# EAGLE board MicroMouse_Schematics_Final2 (EAGLE 8.7.0)
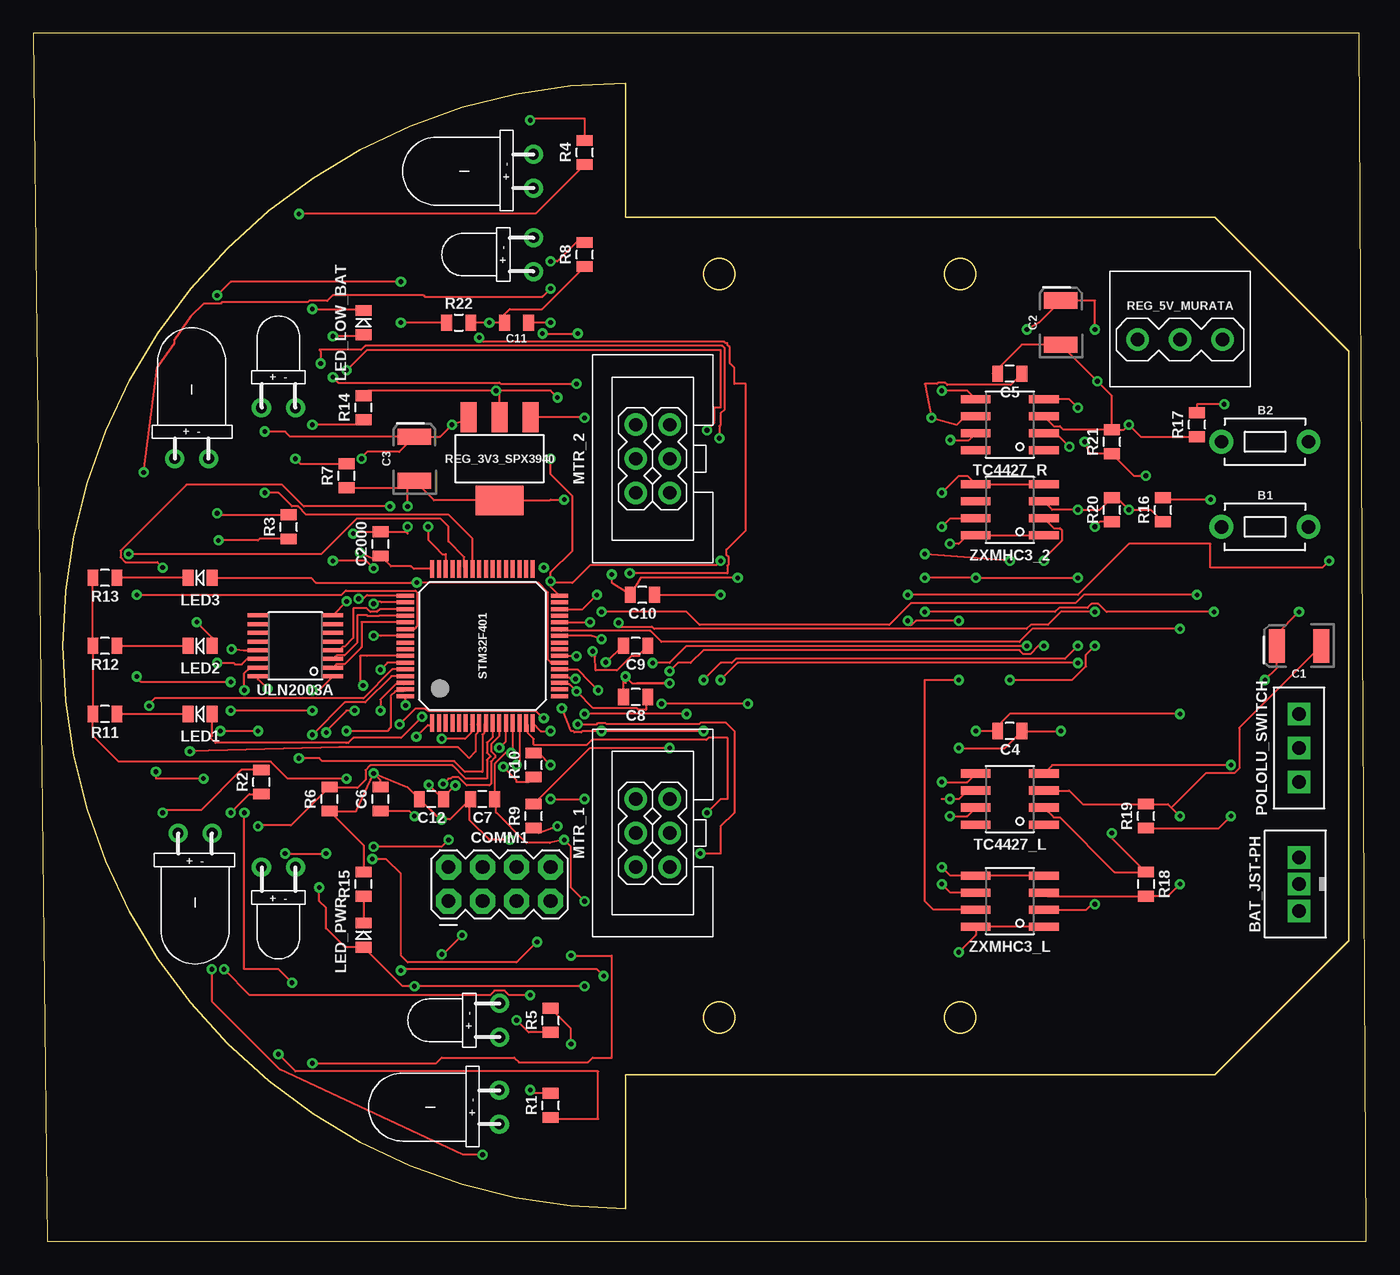
[diagram p0: board, top side]
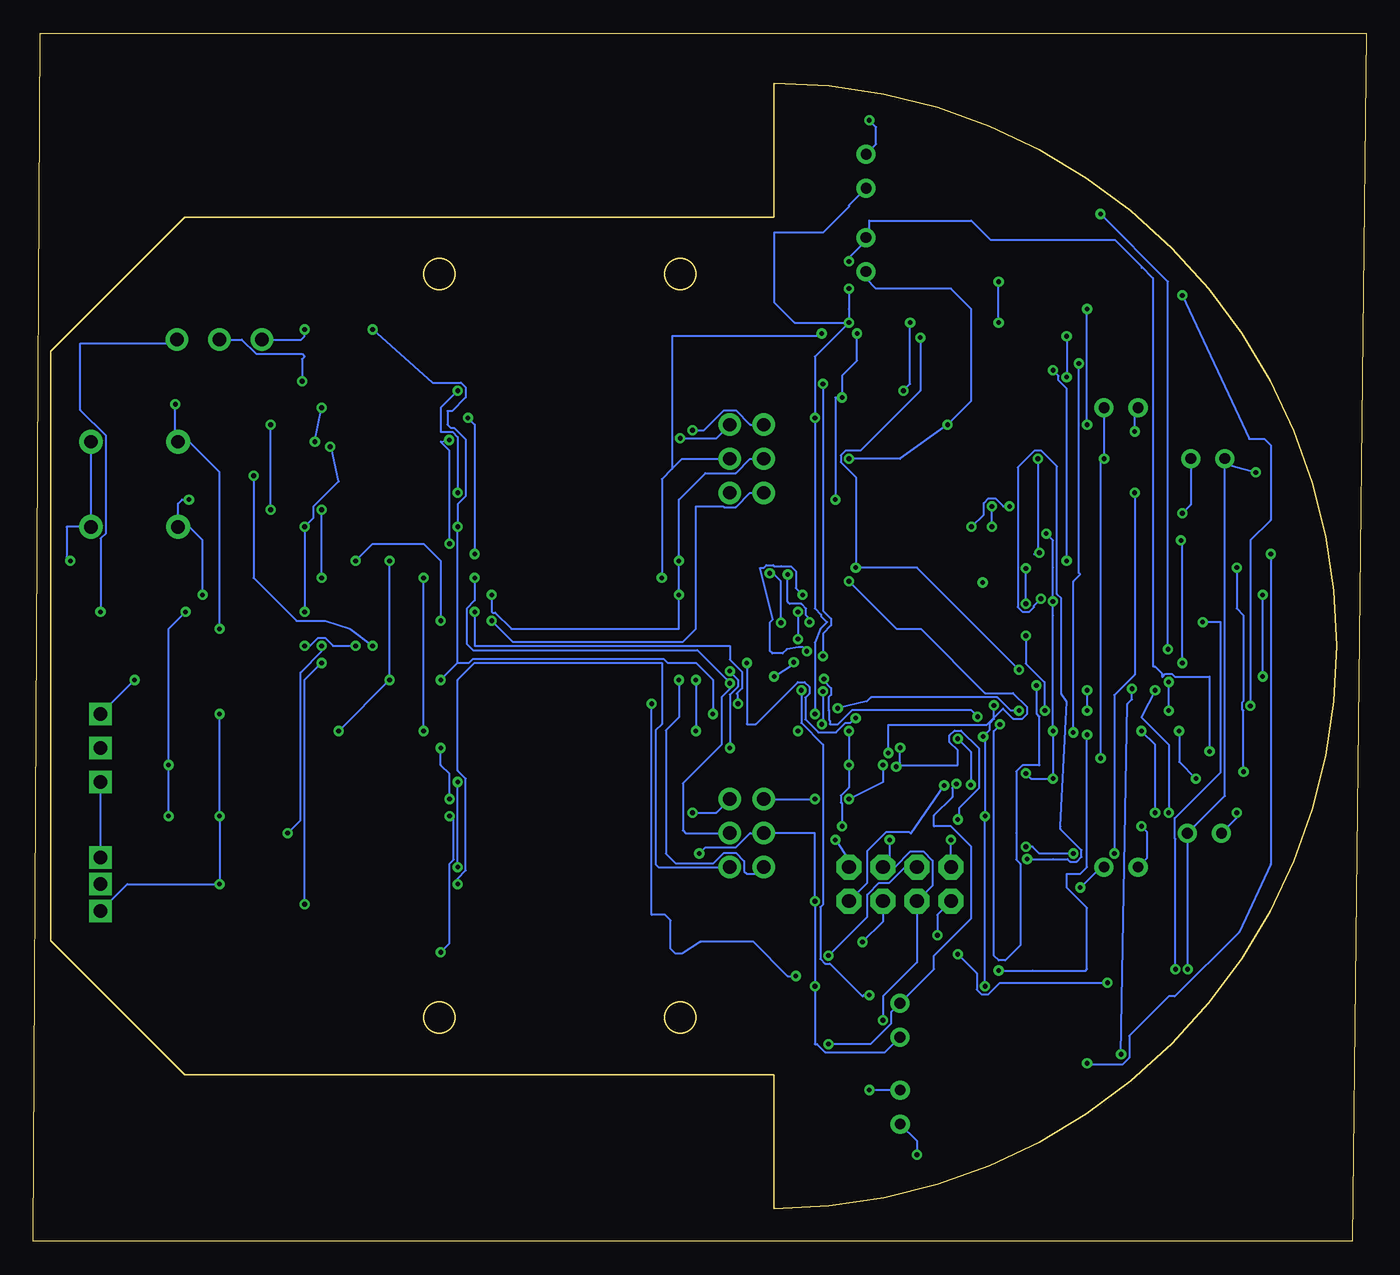
[diagram p1: board, bottom side, seen from below]

Size 99.49 x 90.16 mm. Coordinates in mm from the lower left corner, seen from the top.
Outline: 1.02,0 99.49,0 98.98,90.16 0,90.16 1.02,0
Copper layers (1*16): Top 0.035mm / dielectric 1.5mm / Bottom 0.035mm
Design rules "default": minimum track width 6mil, minimum drill 0.35mm, track to track 6mil, track to pad 6mil, pad to pad 6mil, via to via 6mil, smd to smd 6mil, copper to edge 40mil, drill to drill 6mil, minimum pad ring 10mil, minimum via ring 8mil, stop-mask expansion 4mil, vias tented up to drill 0mil, thermal gap 10mil

## Footprints (pad centres in the part's own frame; a part is rotated, then mirrored left to right if it is on the bottom)
POLOLU_BUTTON = drill 1 pad 1.778: P$1 -3.25,0; P$2 3.25,0
B3B-PH-K-S = drill 1 pad 1.676 square: BAT_+ 2,0; BAT_- -2,0; NC 0,0
EIA3528 = smd 1.2 x 2.5: A 1.65,0; C -1.65,0
0805 = smd 0.8 x 1.2: 1 -0.9,0; 2 0.9,0
2X4 = drill 1.016 pad 1.88 octagon: 1 -3.81,-1.27; 2 -3.81,1.27; 3 -1.27,-1.27; 4 -1.27,1.27; 5 1.27,-1.27; 6 1.27,1.27; 7 3.81,-1.27; 8 3.81,1.27
EMITTER = drill 0.8 pad 1.422: EM_+ -1.397,0.016; EM_- 1.143,0.016
LED-0805 = smd 0.8 x 1.2: A -0.9,0; C 0.9,0
MOTOR_ENCODER_HEADER = drill 1 pad 1.676: ENC_A 2.54,1.27; ENC_B 2.54,-1.27; ENC_GND 0,-1.27; ENC_VDD 0,1.27; MTR+ -2.54,1.27; MTR_- -2.54,-1.27
POLOLU_SWITCH = drill 1 pad 1.676 square: PIN1 -2.54,0; PIN2 0,0; PIN3 2.54,0
RECEIVER = drill 0.8 pad 1.422: RE_+ -1.27,0; RE_- 1.27,0
SOT223 = smd 1.219 x 2.235: GND 0,-3.099; IN -2.311,-3.099; OUT 2.311,-3.099 | smd 3.6 x 2.2: GND2 0,3.099
5V_REG_MURATA = drill 1 pad 1.676: GND 0,0; IN -3.175,0; OUT 3.175,0
LQFP64 = smd 0.3 x 1.3: BOOT0 -1.75,5.75; PA3 -3.75,-5.75; PA4 -2.25,-5.75; PA5 -1.75,-5.75; PA6 -1.25,-5.75; PA7 -0.75,-5.75; PA14 3.75,5.75; PA15 3.25,5.75; PB0 0.75,-5.75; PB1 1.25,-5.75; PB2 1.75,-5.75; PB3 0.75,5.75; PB4 0.25,5.75; PB5 -0.25,5.75; PB6 -0.75,5.75; PB7 -1.25,5.75; PB8 -2.25,5.75; PB9 -2.75,5.75; PB10 2.25,-5.75; PC4 -0.25,-5.75; PC5 0.25,-5.75; PC10 2.75,5.75; PC11 2.25,5.75; PC12 1.75,5.75; PD2 1.25,5.75; VCAP_1 2.75,-5.75; VDD_0 -2.75,-5.75; VDD_1 3.75,-5.75; VDD_3 -3.75,5.75; VSS_0 -3.25,-5.75; VSS_1 -3.25,5.75; VSS_2 3.25,-5.75 | smd 1.3 x 0.3: NRST -5.75,0.75; PA0_WKUP -5.75,-2.75; PA1 -5.75,-3.25; PA2 -5.75,-3.75; PA8 5.75,0.25; PA9 5.75,0.75; PA10 5.75,1.25; PA11 5.75,1.75; PA12 5.75,2.25; PA13 5.75,2.75; PB12 5.75,-3.75; PB13 5.75,-3.25; PB14 5.75,-2.75; PB15 5.75,-2.25; PC0 -5.75,0.25; PC1 -5.75,-0.25; PC2 -5.75,-0.75; PC3 -5.75,-1.25; PC6 5.75,-1.75; PC7 5.75,-1.25; PC8 5.75,-0.75; PC9 5.75,-0.25; PC13 -5.75,3.25; PC14 -5.75,2.75; PC15 -5.75,2.25; PH0 -5.75,1.75; PH1 -5.75,1.25; VBAT -5.75,3.75; VDD_2 5.75,3.75; VDDA -5.75,-2.25; VSS_3 5.75,3.25; VSSA -5.75,-1.75
TC4427_SOIC8 = smd 0.61 x 2.21: GND 0.635,-2.54; IN_A -0.635,-2.54; IN_B 1.905,-2.54; NC1 -1.905,-2.54; NC2 -1.905,2.54; OUT_A -0.635,2.54; OUT_B 1.905,2.54; VDD 0.635,2.54
ULN2003A = smd 1.55 x 0.3: 1B -2.8,2.275; 1C 2.8,2.275; 2B -2.8,1.625; 2C 2.8,1.625; 3B -2.8,0.975; 3C 2.8,0.975; 4B -2.8,0.325; 4C 2.8,0.325; 5B -2.8,-0.325; 5C 2.8,-0.325; 6B -2.8,-0.975; 6C 2.8,-0.975; 7B -2.8,-1.625; 7C 2.8,-1.625; COM 2.8,-2.275; GND -2.8,-2.275
ZXMHC3 = smd 0.61 x 2.21: N1D/P1D -0.635,-2.54; N1G -1.905,-2.54; N1S/N2S 0.635,-2.54; N2D/P2D 0.635,2.54; N2G 1.905,-2.54; P1G -1.905,2.54; P1S/P2S -0.635,2.54; P2G 1.905,2.54

## Placement (x,y rotation side)
B1  POLOLU_BUTTON  [POLOLU_BUTTON]  91.95,53.34 0 top
B2  POLOLU_BUTTON  [POLOLU_BUTTON]  91.95,59.69 0 top
BAT_JST-PH  3PIN  [B3B-PH-K-S]  94.49,26.67 90 top
C1  47uF  [EIA3528]  94.49,44.45 180 top
C2  47uF  [EIA3528]  76.71,68.58 90 top
C3  47uF  [EIA3528]  28.45,58.42 90 top
C4  1.0uF  [0805]  72.9,38.1 180 top
C5  1.0uF  [0805]  72.9,64.77 180 top
C6  0.1uF  [0805]  25.91,33.02 90 top
C7  0.1uF  [0805]  33.53,33.02 180 top
C8  0.1uF  [0805]  44.96,40.64 180 top
C9  2.2uF  [0805]  44.96,44.45 180 top
C10  0.1uF  [0805]  45.47,48.26 180 top
C11  10uF  [0805]  36.07,68.58 180 top
C12  0.1uF  [0805]  29.72,33.02 180 top
C2000  0.1uF  [0805]  25.91,52.07 90 top
COMM1  M04X2  [2X4]  34.8,26.67 0 top
E$1  [MOUSE_OUTLINE_2WHEEL]  60.2,44.45 90 top
EM_1  SFH4545  [EMITTER]  34.8,10.16 90 top
EM_2  SFH4545  [EMITTER]  11.94,30.48 180 top
EM_3  SFH4545  [EMITTER]  11.94,58.42 0 top
EM_4  SFH4545  [EMITTER]  37.34,80.01 90 top
LED1  LED  [LED-0805]  12.45,39.37 180 top
LED2  LED  [LED-0805]  12.45,44.45 180 top
LED3  LED  [LED-0805]  12.45,49.53 180 top
LED_LOW_BAT  LED  [LED-0805]  24.64,68.58 90 top
LED_PWR  LED  [LED-0805]  24.64,22.86 90 top
MTR_1  MOTOR_ENCODER_HEADER  [MOTOR_ENCODER_HEADER]  46.23,30.48 90 top
MTR_2  MOTOR_ENCODER_HEADER  [MOTOR_ENCODER_HEADER]  46.23,58.42 90 top
POLOLU_SWITCH  POLOLU_SWITCH  [POLOLU_SWITCH]  94.49,36.83 90 top
R1  16K  [0805]  38.61,10.16 90 top
R2  16K  [0805]  17.02,34.29 90 top
R3  16K  [0805]  19.05,53.34 90 top
R4  16K  [0805]  41.15,81.28 90 top
R5  1.8K  [0805]  38.61,16.51 90 top
R6  1.8K  [0805]  22.1,33.02 90 top
R7  1.8K  [0805]  23.37,57.15 90 top
R8  1.8K  [0805]  41.15,73.66 90 top
R9  30K  [0805]  37.34,31.75 90 top
R10  10K  [0805]  37.34,35.56 90 top
R11  1K  [0805]  5.33,39.37 180 top
R12  1K  [0805]  5.33,44.45 180 top
R13  1K  [0805]  5.33,49.53 180 top
R14  1K  [0805]  24.64,62.23 90 top
R15  1K  [0805]  24.64,26.67 90 top
R16  47K  [0805]  84.33,54.61 90 top
R17  47K  [0805]  86.87,60.96 90 top
R18  47K  [0805]  83.06,26.67 270 top
R19  47K  [0805]  83.06,31.75 90 top
R20  47K  [0805]  80.52,54.61 90 top
R21  47K  [0805]  80.52,59.69 90 top
R22  47K  [0805]  31.75,68.58 0 top
RE_LD  TEFT4300  [RECEIVER]  18.29,27.94 180 top
RE_LF  TEFT4300  [RECEIVER]  34.8,16.51 90 top
RE_RD  TEFT4300  [RECEIVER]  18.29,62.23 0 top
RE_RF  TEFT4300  [RECEIVER]  37.34,73.66 90 top
REG_3V3_SPX3940  3V3_REG  [SOT223]  34.8,58.42 180 top
REG_5V_MURATA  REG_5V_MURATA  [5V_REG_MURATA]  85.6,67.31 180 top
STM32F401  STM32F4_401_410_411_412_413_446  [LQFP64]  33.53,44.45 90 top
TC4427_L  TC4427_SOIC8  [TC4427_SOIC8]  72.9,33.02 90 top
TC4427_R  TC4427_SOIC8  [TC4427_SOIC8]  72.9,60.96 90 top
ULN2003A  ULN2003A  [ULN2003A]  19.56,44.45 180 top
ZXMHC3_2  ZXMHC3  [ZXMHC3]  72.9,54.61 90 top
ZXMHC3_L  ZXMHC3  [ZXMHC3]  72.9,25.4 90 top

## Library data of the parts
B1 B2 = POLOLU_BUTTON
BAT_JST-PH = BATT_JST-PH_3PIN
C1-C3 = SparkFun-Capacitors; PROD_ID: CAP-08310
C4-C10 C12 C2000 = CAP_CERAMIC_0805IN_2012MM
C11 = SparkFun-Capacitors; PROD_ID: CAP-11330
COMM1 = 2X4_PIN_HEADER
E$1 = MOUSE_OUTLINE_2WHEEL
EM_1-EM_4 = SFH4545
LED1-LED3 LED_LOW_BAT LED_PWR = LED_0805
MTR_1 MTR_2 = MOTOR_ENCODER_HEADER
POLOLU_SWITCH = POLOLU_SWITCH
R1-R22 = RESISTOR_0805IN_2012MM
RE_LD RE_LF RE_RD RE_RF = TEFT4300
REG_3V3_SPX3940 = REG_3V3_LM3940
REG_5V_MURATA = REG_5V_MURATA
STM32F401 = STM32F4_401_410_411_412_413_446
TC4427_L TC4427_R = TC4427
ULN2003A = ULN2003A
ZXMHC3_2 ZXMHC3_L = ZXMHC3

## Nets
+3V3: B1.P$2 B2.P$2 C3.A C6.1 C7.1 C8.1 C10.1 C2000.1 COMM1.8 LED_PWR.A MTR_1.ENC_VDD MTR_2.ENC_VDD RE_LD.RE_+ RE_LF.RE_+ RE_RD.RE_+ RE_RF.RE_+ REG_3V3_SPX3940.OUT STM32F401.VBAT STM32F401.VDD_0 STM32F401.VDD_1 STM32F401.VDD_2 STM32F401.VDD_3 STM32F401.VDDA
+5V: C2.A C11.1 EM_1.EM_+ EM_2.EM_+ EM_3.EM_+ EM_4.EM_+ REG_3V3_SPX3940.IN REG_5V_MURATA.OUT ZXMHC3_2.P1S/P2S ZXMHC3_L.P1S/P2S
B0: B1.P$1 R16.2 STM32F401.PB0
B1: B2.P$1 R17.2 STM32F401.PB1
EM_LD: STM32F401.PC12 ULN2003A.2B
EM_LF: STM32F401.PD2 ULN2003A.1B
EM_RD: STM32F401.PC11 ULN2003A.3B
EM_RF: STM32F401.PC10 ULN2003A.4B
GND: BAT_JST-PH.BAT_- C1.C C2.C C4.2 C5.2 C8.2 C9.2 MTR_1.ENC_GND R16.1 R17.1 R18.2 R19.2 R20.2 R21.2 REG_5V_MURATA.GND TC4427_L.GND TC4427_R.GND ZXMHC3_2.N1S/N2S ZXMHC3_L.N1S/N2S
LED1: LED1.A STM32F401.PA4
LED2: LED2.A STM32F401.PA5
LED3: LED3.A STM32F401.PA6
LED_LOW_BAT: LED_LOW_BAT.A STM32F401.PA7
LENC_A: MTR_1.ENC_A STM32F401.PA0_WKUP
LENC_B: MTR_1.ENC_B STM32F401.PA1
LMTR+: MTR_1.MTR+ ZXMHC3_L.N1D/P1D
LMTR-: MTR_1.MTR_- ZXMHC3_L.N2D/P2D
LPWM_A: R18.1 STM32F401.PB9 TC4427_L.IN_A
LPWM_B: R19.1 STM32F401.PB8 TC4427_L.IN_B
N$1: BAT_JST-PH.BAT_+ POLOLU_SWITCH.PIN1
N$3: C1.A POLOLU_SWITCH.PIN3 REG_5V_MURATA.IN
N$4: LED1.C R11.1
N$5: LED2.C R12.1
N$6: LED3.C R13.1
N$7: R1.1 ULN2003A.1C
N$8: LED_LOW_BAT.C R14.1
N$9: R2.1 ULN2003A.2C
N$10: LED_PWR.C R15.1
N$11: R3.1 ULN2003A.3C
N$12: TC4427_L.OUT_A ZXMHC3_L.N1G ZXMHC3_L.P1G
N$13: R4.1 ULN2003A.4C
N$14: EM_1.EM_- R1.2
N$15: TC4427_L.OUT_B ZXMHC3_L.N2G ZXMHC3_L.P2G
N$16: EM_2.EM_- R2.2
N$17: EM_3.EM_- R3.2
N$18: EM_4.EM_- R4.2
N$21: TC4427_R.OUT_A ZXMHC3_2.N1G ZXMHC3_2.P1G
N$25: TC4427_R.OUT_B ZXMHC3_2.N2G ZXMHC3_2.P2G
N$28: C9.1 STM32F401.VCAP_1
N$32: R22.1 STM32F401.BOOT0
NRST: C12.1 COMM1.7 STM32F401.NRST
RE_LD: R6.2 RE_LD.RE_- STM32F401.PC2
RE_LF: R5.2 RE_LF.RE_- STM32F401.PC3
RE_RD: R7.2 RE_RD.RE_- STM32F401.PC1
RE_RF: R8.2 RE_RF.RE_- STM32F401.PC0
RENC_A: MTR_2.ENC_A STM32F401.PA15
RENC_B: MTR_2.ENC_B STM32F401.PB3
RMRT-: ZXMHC3_2.N2D/P2D
RMTR+: MTR_2.MTR+ ZXMHC3_2.N1D/P1D
RMTR-: MTR_2.MTR_-
RPWM_A: R20.1 STM32F401.PB7 TC4427_R.IN_A
RPWM_B: R21.1 STM32F401.PB6 TC4427_R.IN_B
RX: COMM1.4 STM32F401.PA10
S$1: C3.C C6.2 C7.2 C10.2 C11.2 C12.2 C2000.2 COMM1.3 COMM1.6 MTR_2.ENC_GND R5.1 R6.1 R7.1 R8.1 R10.1 R11.2 R12.2 R13.2 R14.2 R15.2 R22.2 REG_3V3_SPX3940.GND REG_3V3_SPX3940.GND2 STM32F401.PB2 STM32F401.VSS_1 STM32F401.VSSA ULN2003A.GND
SWCLK: COMM1.5 STM32F401.PA14
SWDIO: COMM1.1 STM32F401.PA13
TX: COMM1.2 STM32F401.PA9
VBAT: C4.1 C5.1 R9.2 TC4427_L.VDD TC4427_R.VDD
VCAP_1: STM32F401.VSS_2
VCAP_2: STM32F401.VSS_3
VOLTMETER: R9.1 R10.2 STM32F401.PA2
VSS_0: STM32F401.VSS_0

## Tracks (layer width: path | path; a pad name or v marks a point on that pad's centre or on a via)
+3V3  (via drill 0.35)
  Top 0.152: v65.28,48.26 77.98,48.26 81.79,52.07 87.88,52.07 87.88,50.29 96.23,50.29 v96.74,50.8 | STM32F401.VDD_0 39.4,41.58 40.02,41.58 v40.55,41.05 | v40.55,41.05 41.79,39.81 45.03,39.81 45.17,39.67 45.72,39.67 45.72,40.5 C8.1 | v41.15,25.4 40.13,26.42 40.13,29.46 v39.62,29.97 38.55,29.76 36.79,29.76 34.53,32.02 34.53,33 | v41.15,19.05 v28.45,19.05 27.55,19.05 LED_PWR.A 23.25,21.96 21.84,23.37 21.84,24.89 21.34,25.4 v21.34,26.42 | v28.45,31.75 28.08,32.12 C6.1 | C3.A 19.18,60.07 18.8,60.45 v17.27,60.45 | REG_3V3_SPX3940.OUT 32.26,61.29 v31.24,60.96 30.35,60.07 C3.A | v27.78,40.01 STM32F401.VDD_3 | STM32F401.VBAT 29.59,38.54 29.44,38.54 v28.58,37.68 | 35.78,36.99 STM32F401.VDDA 35.78,36.57 v35.67,36.46 35.24,36.46 34.47,35.69 34.47,33.06 34.53,33 | v40.55,41.05 v40.54,41.05 | v40.63,38.6 42.06,38.6 42.17,38.71 42.67,38.71 42.77,38.61 49.69,38.61 49.79,38.71 51.72,38.71 52.32,38.1 52.32,32 51.31,30.99 51.31,28.96 v49.78,28.96 | STM32F401.VDD_2 28.38,50.2 28.19,50.39 26.69,50.39 26.09,50.98 | 26.09,50.98 C2000.1 | C3.A 27.31,58.93 24.89,58.93 24.5,58.53 v24.5,58.42 | v24.38,51.41 25.31,50.98 26.09,50.98 | C10.1 v51.31,48.26 | v38.61,49.28 38.72,49.16 40.24,49.16 41.55,50.48 50.98,50.48 v51.31,50.8 | STM32F401.VDD_1 38.61,48.87 v38.61,49.28 | C7.1 34.44,33 34.53,33 | v38.61,49.28 38.61,49.94 40.23,51.56 40.23,55.62 38.61,57.25 v38.61,58.42
  Bottom 0.152: v65.28,48.26 65.28,46.99 65.22,46.93 65.03,46.93 63.81,45.72 51.31,45.72 v51.31,48.26 v51.31,50.8 51.31,55.37 49.33,57.35 47.06,57.35 45.99,58.42 MTR_2.ENC_VDD | v28.45,19.05 v28.45,31.75 28.45,37.59 28.49,37.59 v28.58,37.68 28.09,38.18 28.09,38.7 27.78,39.01 v27.78,40.01 27.78,40.04 | v38.61,58.42 34.8,58.42 v31.24,60.96 29.46,62.74 29.46,69.6 30.99,71.12 36.58,71.12 37.34,71.88 RE_RF.RE_+ | v40.54,41.05 40.54,38.71 40.64,38.61 v40.63,38.6 | v24.5,58.42 24.5,51.42 24.38,51.31 24.79,51.31 v24.38,51.41 | v38.61,49.28 35.05,45.72 33.25,45.72 28.45,40.92 26.35,40.92 25.3,39.88 25.3,39.37 25.66,39.02 26.36,39.02 27.11,39.77 28.32,38.56 35.67,38.56 v35.67,36.46 | B2.P$2 B1.P$2 97.03,53.34 97.03,51.09 v96.74,50.8 | v17.27,60.45 17.27,61.98 RE_RD.RE_+ | v49.78,28.96 49.33,29.41 47.06,29.41 45.99,30.48 MTR_1.ENC_VDD 41.15,30.48 v41.15,25.4 v41.15,19.05 41.15,14.73 40.99,14.73 40.38,14.12 35.91,14.12 RE_LF.RE_+ | v39.62,29.97 38.61,28.45 COMM1.8 | v21.34,26.42 19.81,27.94 RE_LD.RE_+
+5V  (via drill 0.35)
  Top 0.152: ZXMHC3_L.P1S/P2S 67.18,24.77 66.55,25.4 66.55,41.91 v69.09,41.91 | v67.82,53.34 68.45,53.98 ZXMHC3_2.P1S/P2S | v74.17,68.07 75.06,68.58 C2.A 79.25,70.23 v79.25,68.07 | v48.77,39.37 v41.15,39.37 | v38.61,68.58 C11.1 | v41.15,61.47 41.1,61.52 REG_3V3_SPX3940.IN | v38.61,71.12 38,70.51 29.21,70.51 29.11,70.61 22.35,70.61 21.94,70.2 20.58,70.2 20.48,70.1 14.07,70.1 13.97,70 12.71,70 11.75,69.04 10.54,67.32 10.54,67.06 9.24,65.2 v8.23,57.4 | v33.53,6.47 32.06,6.47 24.95,9.79 18.39,12.85 13.34,17.9 13.34,20.32 v13.31,20.32
  Bottom 0.152: 67.82,43.18 v69.09,41.91 | 67.82,43.18 v67.82,53.34 67.82,55.02 67.21,55.63 67.21,59.86 68.08,60.73 68.35,60.73 68.58,60.96 68.58,61.98 68.23,61.98 67.21,62.99 67.21,63.75 67.57,64.11 69.69,64.11 v74.17,68.07 | 67.82,43.18 66.98,43.18 66.67,43.48 52.45,43.48 52.15,43.18 50.04,43.18 48.77,41.91 v48.77,39.37 | EM_4.EM_+ 38.61,77.33 38.61,77.22 40.53,75.29 44.2,75.29 44.2,70.1 42.67,68.58 v38.61,68.58 | v41.15,39.37 41.15,44.7 40.75,45.72 40.24,46.23 40.69,46.68 40.69,46.79 41.15,47.24 v41.15,61.47 41.15,66.04 v38.61,68.58 | REG_5V_MURATA.OUT 79.5,67.31 79.25,67.56 v79.25,68.07 | EM_1.EM_+ 33.53,7.51 v33.53,6.47 | v13.31,20.32 13.31,30.44 EM_2.EM_+ 10.54,33.26 EM_3.EM_+ 10.02,57.91 v8.23,57.4 | v38.61,71.12 38.61,69.6 v38.61,68.58
B0  (via drill 0.35)
  Top 0.152: v86.87,48.26 78.41,48.26 77.8,47.65 65.53,47.65 63.9,46.02 49.73,46.02 48.77,46.99 v42.42,46.99 | v42.42,44.96 41.67,45.2 STM32F401.PB0 | v87.88,55.37 84.47,55.37 R16.2
  Bottom 0.152: v86.87,48.26 86.87,52.32 87.88,53.34 B1.P$1 88.7,55.07 88.39,55.37 v87.88,55.37 | v42.42,46.99 v42.42,44.96
B1  (via drill 0.35)
  Top 0.152: v85.6,45.72 74.58,45.72 73.61,44.75 46.88,44.75 46.05,45.58 39.4,45.58 STM32F401.PB1 | v88.9,62.48 86.87,62.48 R17.2
  Bottom 0.152: v85.6,45.72 85.6,57.4 87.88,59.69 B2.P$1 88.9,59.89 v88.9,62.48
EM_LD
  Top 0.152: STM32F401.PC12 27.75,46.23 24.49,46.23 24.49,44.35 23.23,43.1 22.63,43.1 ULN2003A.2B
EM_LF  (via drill 0.35)
  Top 0.152: STM32F401.PD2 28.45,45.7 28.45,45.75 28.66,45.95 28.66,48.45 28.52,48.58 23.32,48.58 23,48.26 v7.72,48.26 | v20.83,39.62 v14.74,39.62 v14.73,39.62 | v14.73,41.75 8.03,41.75 7.62,42.16 v7.72,42.16 | ULN2003A.1B 21.33,41.15 v20.83,41.15
  Bottom 0.152: v20.83,41.15 v20.83,39.62 | v14.73,39.62 v14.73,41.75 | v7.72,42.16 v7.72,48.26
EM_RD
  Top 0.152: ULN2003A.3B 22.37,43.48 22.64,43.75 23.23,43.75 24.18,44.7 24.18,46.74 24.89,46.74 24.95,46.68 25.78,46.68 25.8,46.7 STM32F401.PC11
EM_RF
  Top 0.152: ULN2003A.4B 22.86,44.17 23.08,44.4 23.23,44.4 23.88,45.05 23.88,47.24 24.89,47.24 25.15,46.99 25.65,46.99 25.86,47.2 STM32F401.PC10
GND  (via drill 0.35)
  Top 0.152: ZXMHC3_L.N1S/N2S 75.7,25.77 R18.2 84.7,25.77 v85.6,26.67 | 84.96,32.38 84.7,32.65 R19.2 78.35,32.65 77.34,33.66 TC4427_L.GND | 84.96,32.38 v85.6,31.75 | 84.96,32.38 87.53,34.95 89.66,34.95 90.01,35.31 90.01,38.33 C1.C | C4.2 71.63,38.1 | 71.63,38.1 v70.36,38.1 | v77.98,49.53 v70.36,49.53 v66.55,49.53 | ZXMHC3_2.N1S/N2S 76.07,54.61 v77.98,54.61 79.62,54.61 R20.2 80.89,55.51 v81.79,54.61 83.43,54.61 R16.1 | R17.1 82.69,60.06 v81.79,60.96 81.42,60.59 R21.2 | R21.2 76.91,60.59 76.64,60.86 76.17,60.86 TC4427_R.GND | C2.C 73.79,66.93 71.63,64.77 C5.2 | v85.6,39.37 72.9,39.37 71.63,38.1 | R21.2 80.52,63.12 v79.44,64.2 C2.C | 45.08,41.66 v47.5,41.66 44.7,41.66 v44.2,42.16 | v42.73,43.24 C9.2 | 44.2,41.66 v44.2,42.16 | 77.85,66.93 C2.C | C8.2 44.06,42.03 v44.2,42.16
  Bottom 0.152: v70.36,38.1 v70.36,49.53 | v77.98,49.53 v77.98,54.61 | v81.79,54.61 v81.79,60.96 | v85.6,39.37 v85.6,31.75 v85.6,26.67 92.49,26.67 BAT_JST-PH.BAT_- | v66.55,49.53 66.55,47.85 67.16,47.24 67.16,44.63 66.67,44.14 49.93,44.14 47.75,41.97 47.55,41.97 47.5,41.91 v47.5,41.66 47.5,41.24 48.11,40.63 48.11,37.08 51,34.18 51,30.68 50.8,30.48 MTR_1.ENC_GND | v44.2,42.16 42.73,43.12 v42.73,43.24 | REG_5V_MURATA.GND 83.93,67.31 82.87,66.24 79.45,66.24 79.25,66.04 79.44,65.85 v79.44,64.2
LED1  (via drill 0.35)
  Top 0.152: v29,39.16 27.43,37.59 23.88,37.59 23.5,37.22 23.36,37.21 13.59,37.21 13.21,37.59 13.35,37.73 LED1.A | v40.47,41.99 40.11,41.99 40.02,42.08 39.4,42.08 STM32F401.PA4
  Bottom 0.152: v29,39.16 29.51,39.67 38.35,39.67 39.41,38.61 40.03,38.61 40.03,38.85 40.08,38.91 40.08,39.67 40.13,39.62 40.13,40.61 39.93,40.8 39.93,41.31 40.47,41.84 v40.47,41.99
LED2  (via drill 0.35)
  Top 0.152: v42.16,41.15 41.08,42.24 40.62,42.7 STM32F401.PA5 | v37.08,18.39 35.52,18.39 35.19,18.72 34.41,18.72 34.08,18.39 16.16,18.39 v14.22,20.32 | LED2.A 13.35,45.07 v12.19,46.23
  Bottom 0.152: v42.16,41.15 42.16,38.7 40.54,37.08 40.54,32 40.54,30.99 40.54,27.43 40.54,25.15 40.74,24.95 40.74,21.09 40.38,20.73 40.03,20.73 37.59,18.29 37.49,18.39 v37.08,18.39 | v14.22,20.32 14.22,30.02 14.27,30.08 14.27,31.6 10.85,35.03 10.85,46.23 v12.19,46.23
LED3  (via drill 0.35)
  Top 0.152: LED3.A 20.73,49.53 21.08,49.18 28.19,49.18 28.29,49.28 28.96,49.28 28.86,49.18 v28.63,49.18 37.68,49.18 38.4,48.47 38.4,43.45 38.61,43.25 38.61,43.18 39.26,43.18 STM32F401.PA6
LED_LOW_BAT  (via drill 0.35)
  Top 0.152: LED_LOW_BAT.A 24.52,67.56 v22.35,67.56 | v22.35,64.52 22.76,64.11 34.8,64.11 34.89,64.01 v40.54,64.01 40.64,64.01 | STM32F401.PA7 40.63,43.7 40.64,43.69 v40.54,43.69
  Bottom 0.152: v22.35,67.56 v22.35,64.52 | v40.54,64.01 40.54,47.09 39.93,46.48 39.93,45.98 40.54,45.37 v40.54,43.69
LENC_A  (via drill 0.35)
  Top 0.152: STM32F401.PA0_WKUP 36.28,35.77 v36.07,35.56 | v38.61,33.02 v41.15,33.02
  Bottom 0.152: v36.07,35.56 36.07,34.29 v38.61,33.02 | MTR_1.ENC_A v41.15,33.02
LENC_B  (via drill 0.35)
  Top 0.152: STM32F401.PA1 36.9,38.58 36.9,37.95 37.34,37.52 37.34,37.09 41.35,37.09 41.69,37.44 50.23,37.44 50.39,37.59 51.82,37.59 51.82,33.02 51.31,33.02 v50.29,32
  Bottom 0.152: v50.29,32 48.51,32 MTR_1.ENC_B
LMTR+  (via drill 0.35)
  Top 0.152: ZXMHC3_L.N1D/P1D 78.61,24.77 79.25,25.4 v79.25,25.16 | v77.98,43.18 52.58,43.18 v51.31,41.91
  Bottom 0.152: v79.25,25.16 79.25,41.91 v77.98,43.18 | v51.31,41.91 51.31,39.12 52.27,38.15 52.27,28.96 51.56,28.24 48.7,28.24 47.94,29.01 47.06,29.01 46.43,28.38 46.43,27.63 46.23,27.43 45.47,27.43 MTR_1.MTR+
LMTR-  (via drill 0.35)
  Top 0.152: ZXMHC3_L.N2D/P2D 68.45,26.03 v67.82,26.67
  Bottom 0.152: v67.82,26.67 67.82,27.08 67.21,27.69 67.21,34.54 67.82,35.15 67.82,41.91 66.55,43.18 52.58,43.18 52.58,38.61 53.03,38.15 53.03,28.14 52.83,27.94 MTR_1.MTR_-
LPWM_A  (via drill 0.35)
  Top 0.152: TC4427_L.IN_A 76.17,31.65 76.64,31.65 80.72,27.57 R18.1 80.52,30.11 v80.52,30.48 | v77.98,44.45 77.01,43.48 52.45,43.48 52.15,43.18 51.31,43.18 v50.04,41.91 | v50.04,38.1 v42.42,38.1 40.99,38.1 40.88,37.99 40.38,37.99 40.27,38.1 40.13,38.1 v39.45,39.8 | STM32F401.PB9 27.66,41.58 27.03,41.58 25.91,40.45 v25.91,39.62
  Bottom 0.152: v80.52,30.48 79.55,31.45 79.55,42.46 77.98,44.04 v77.98,44.45 | v50.04,41.91 v50.04,38.1 | v25.91,39.62 26.53,39.62 27.53,40.62 36.95,40.62 37.27,40.31 v39.45,39.8
LPWM_B  (via drill 0.35)
  Top 0.152: R19.1 88.51,30.85 v89.41,31.75 | v89.41,35.56 76.07,35.56 TC4427_L.IN_B | v66.55,46.99 76.28,46.99 76.58,47.3 78.69,47.3 79,47.6 79.5,47.6 80.11,46.99 v88.14,46.99 | v42.57,19.81 42.06,20.32 27.43,20.32 v27.43,20.22 | STM32F401.PB8 26.72,42.2 24.76,40.24 23.25,40.24 v20.83,37.82 | v53.34,40.13 v46.89,40.13 46.74,40.13
  Bottom 0.152: v89.41,31.75 v89.41,35.56 89.41,45.72 v88.14,46.99 | v66.55,46.99 66.55,44.45 47.5,44.45 47.5,43.43 46.59,42.52 46.59,41.29 46.98,40.89 46.89,40.8 v46.89,40.13 | v42.57,19.81 43.18,19.81 45.72,22.35 49.69,22.35 51.06,21.49 51.56,21.49 51.91,21.85 51.91,23.98 52.32,24.38 53.34,24.38 v53.34,40.13 | v27.43,20.22 24.89,20.22 20.93,20.22 20.83,20.32 20.83,24.89 22.35,26.42 22.35,27.43 21.34,27.43 20.83,27.94 v20.83,37.82
N$1
  Bottom 0.152: BAT_JST-PH.BAT_+ POLOLU_SWITCH.PIN1
N$3  (via drill 0.35)
  Top 0.152: v91.95,41.91 92.84,42.8 C1.A 92.84,45.34 v94.49,46.99
  Bottom 0.152: v94.49,46.99 94.49,52.47 94.08,52.88 94.08,60.15 95.98,62.06 95.98,67.03 89.18,67.03 88.9,67.31 REG_5V_MURATA.IN | POLOLU_SWITCH.PIN3 v91.95,41.91
N$4
  Top 0.152: R11.1 LED1.C
N$5
  Top 0.152: R12.1 LED2.C
N$6
  Top 0.152: LED3.C R13.1
N$7  (via drill 0.35)
  Top 0.152: ULN2003A.1C 16.77,41.95 v17.47,41.25 | v18.29,13.97 19.56,12.7 42.16,12.7 42.16,9.14 38.72,9.14 R1.1
  Bottom 0.152: v18.29,13.97 17.81,40.13 17.47,40.47 v17.47,41.25
N$8  (via drill 0.35)
  Top 0.152: R14.1 24.27,60.96 v20.83,60.96 | v20.83,69.6 24.52,69.6 LED_LOW_BAT.C
  Bottom 0.152: v20.83,60.96 v20.83,69.6
N$9  (via drill 0.35)
  Top 0.152: v14.73,32 16.12,33.39 R2.1 | v15.75,41.15 15.75,42.41 16.16,42.82 ULN2003A.2C
  Bottom 0.152: v15.75,41.15 16.76,39.12 14.73,37.08 v14.73,32
N$10
  Top 0.152: R15.1 LED_PWR.C
N$11  (via drill 0.35)
  Top 0.152: R3.1 16.88,52.44 16.76,52.32 v13.81,52.32 | ULN2003A.3C 15.94,43.48 15.54,43.08 15.04,43.08 14.94,43.18 v13.72,43.18
  Bottom 0.152: v13.72,43.18 13.72,52.23 v13.81,52.32
N$12  (via drill 0.35)
  Top 0.152: ZXMHC3_L.N1G ZXMHC3_L.P1G 70.36,22.86 v69.09,21.59 | v68.42,31.75 69.72,31.75 TC4427_L.OUT_A
  Bottom 0.152: v69.09,21.59 68.42,22.25 68.42,28.19 68.12,28.49 68.12,31.75 v68.42,31.75
N$13  (via drill 0.35)
  Top 0.152: R4.1 37.79,77.02 37.48,76.71 19.81,76.71 v19.83,76.69 | ULN2003A.4C 16.75,44.12 16.64,44.09 15.7,44.09 v14.78,44.2
  Bottom 0.152: v14.78,44.2 14.78,71.65 v19.83,76.69
N$14  (via drill 0.35)
  Top 0.152: R1.2 37.33,11.06 v37.08,11.3
  Bottom 0.152: EM_1.EM_- v37.08,11.3
N$15  (via drill 0.35)
  Top 0.152: ZXMHC3_L.N2G ZXMHC3_L.P2G 68.45,27.3 v67.82,27.94 | v67.82,34.29 69.72,34.29 TC4427_L.OUT_B
  Bottom 0.152: v67.82,27.94 v67.82,34.29
N$16  (via drill 0.35)
  Top 0.152: R2.2 15.52,35.19 12.52,32.19 9.84,32.19 v9.65,32
  Bottom 0.152: v9.65,32 9.65,31.61 EM_2.EM_-
N$17  (via drill 0.35)
  Top 0.152: v13.72,54.36 13.83,54.24 R3.2
  Bottom 0.152: EM_3.EM_- 13.08,54.99 v13.72,54.36
N$18  (via drill 0.35)
  Top 0.152: v37.08,83.69 37.22,83.82 41.15,83.82 R4.2
  Bottom 0.152: EM_4.EM_- 36.58,81.9 36.58,83.18 v37.08,83.69
N$21  (via drill 0.35)
  Top 0.152: ZXMHC3_2.N1G ZXMHC3_2.P1G 69.72,52.7 69.09,52.07 v68.42,52.07 | v68.45,59.82 69.85,59.82 TC4427_R.OUT_A
  Bottom 0.152: v68.42,52.07 68.42,59.03 69.09,59.69 v68.45,59.82
N$25  (via drill 0.35)
  Top 0.152: TC4427_R.OUT_B 69.72,63.5 v67.82,63.5 | v67.82,55.88 69.09,57.15 69.72,57.15 ZXMHC3_2.P2G ZXMHC3_2.N2G
  Bottom 0.152: v67.82,63.5 69.09,62.23 69.09,60.45 69.06,60.42 68.2,60.42 67.82,60.04 v67.82,55.88
N$28  (via drill 0.35)
  Top 0.152: STM32F401.VCAP_1 41,47.2 v42.06,48.26 | C9.1 45.21,43.8 45.21,43.69 44.62,43.69 43.56,42.63 41.97,42.63 41.93,43.69 41.66,43.69 41.66,43.95 v41.75,44.05
  Bottom 0.152: v41.75,44.05 42.06,44.35 42.37,44.35 43.25,44.21 43.56,43.89 44.32,43.89 44.5,44.07 44.5,46.23 44.3,46.44 45.25,50.28 44.96,50.28 44.77,50.48 44.27,50.48 44.2,50.41 43.68,50.41 43.43,50.39 42.93,50.39 42.57,50.03 42.57,48.77 v42.06,48.26
N$32  (via drill 0.35)
  Top 0.152: R22.1 v27.43,68.58 | v27.43,71.63 14.73,71.63 v13.72,70.61 | v8.64,39.98 8.64,40.13 9.05,40.54 24.64,40.54 26.79,42.7 STM32F401.BOOT0
  Bottom 0.152: v27.43,68.58 v27.43,71.63 | v13.72,70.61 8.72,59.9 7.58,59.9 7.11,59.44 7.11,53.85 8.64,52.32 v8.64,39.98
NRST  (via drill 0.35)
  Top 0.152: STM32F401.NRST 32.66,38.58 32.66,37.95 32.22,37.52 v30.48,37.52 | v29.51,34.08 30.57,33.02 C12.1 30.62,33.16 v31.5,34.04
  Bottom 0.152: v31.5,34.04 33.98,30.44 34.12,30.58 35.81,30.58 37.24,29.15 37.24,26.77 COMM1.7 | v30.48,37.52 29.51,36.55 v29.51,34.08
RE_LD  (via drill 0.35)
  Top 0.152: 22.03,33.85 19.23,31.06 16.83,31.06 v16.76,30.99 | 22.03,33.85 R6.2 | STM32F401.PC2 34.28,37.64 33.86,37.23 33.86,36.47 34.13,36.21 33.86,35.94 33.86,34.54 32.28,34.54 31.28,35.54 25.15,35.54 24.79,35.19 24.79,34.45 24.2,33.85 22.03,33.85
  Bottom 0.152: RE_LD.RE_- 16.36,28.6 16.36,30.58 v16.76,30.99
RE_LF  (via drill 0.35)
  Top 0.152: STM32F401.PC3 34.78,37.71 34.17,37.1 34.17,36.6 34.48,36.29 34.48,36.13 34.16,35.81 34.16,34.16 34.04,34.04 32.35,34.04 31.75,34.64 31.25,34.64 31.15,34.54 30.98,34.54 v30.59,34.15 | v40.13,14.73 40.13,15.89 R5.2
  Bottom 0.152: v30.59,34.15 30.89,33.85 30.89,33.17 32.26,31.8 32.26,30.99 30.99,30.99 29.46,29.46 29.46,24.13 32.26,21.34 32.26,20.32 RE_LF.RE_- 35.46,17.12 35.46,16.26 36.99,14.73 v40.13,14.73
RE_RD  (via drill 0.35)
  Top 0.152: v19.56,58.42 19.93,58.05 R7.2 | STM32F401.PC1 33.66,38.58 33.66,37.95 33.53,37.83 33.53,35.05 32.2,35.05 31.41,35.85 22.86,35.85 21.56,35.85 21.34,36.07 v19.81,36.07
  Bottom 0.152: RE_RD.RE_- v19.56,58.42 19.81,58.17 v19.81,36.07
RE_RF  (via drill 0.35)
  Top 0.152: STM32F401.PC0 33.16,38.58 33.16,37.95 33.02,37.82 33.02,36.58 32.51,36.07 31.69,36.89 22.85,36.89 v11.68,36.58 | R8.2 40.52,74.56 39.12,73.15 v38.61,73.15
  Bottom 0.152: 16.76,72.77 18.73,74.74 28,74.74 29.46,76.2 37.08,76.2 37.08,75.18 RE_RF.RE_- 37.34,74.68 38.61,73.41 v38.61,73.15 | 16.76,72.77 16.76,72.64 | 16.76,72.77 15.9,71.91 15.9,42.93 15.79,42.91 15.75,42.91 15.24,42.4 15.24,42.16 15.18,42.16 14.98,42.36 14.48,42.36 14.28,42.16 11.68,42.16 v11.68,36.58
RENC_A  (via drill 0.35)
  Top 0.152: STM32F401.PA15 25.96,47.7 25.91,47.75 25.56,47.75 v25.4,47.59 | v25.4,50.24 24.84,50.8 v22.35,50.8 | v23.37,65.02 24.89,66.55 51.31,66.55 51.31,62.23 50.8,62.23 50.8,61.06 v50.29,60.55
  Bottom 0.152: v25.4,47.59 v25.4,50.24 25.4,50.29 | v23.37,65.02 22.96,64.61 22.96,64.27 22.35,63.66 v22.35,50.8 | v50.29,60.55 49.42,60.55 47.94,62.03 47.06,62.03 45.99,60.96 MTR_2.ENC_A
RENC_B  (via drill 0.35)
  Top 0.152: v21.44,65.53 21.44,66.45 21.34,66.55 24.46,66.55 24.77,66.85 51.43,66.85 51.61,66.67 51.61,62.1 51.31,61.8 51.31,60.96 51.21,60.86 v51.21,59.94 | STM32F401.PB3 25.92,45.2 25.91,45.21 v25.4,45.21 | v23.97,39.62 23.37,39.62 21.84,38.1 21.84,38 v21.86,37.99
  Bottom 0.152: v25.4,45.21 25.4,43.14 24.01,41.75 24.01,39.76 23.88,39.62 v23.97,39.62 | v23.97,39.62 | v21.86,37.99 21.84,38 21.84,49.28 21.34,49.78 21.44,49.88 v21.44,65.53 | v51.21,59.94 48.51,59.94 MTR_2.ENC_B
RMTR+  (via drill 0.35)
  Top 0.152: ZXMHC3_2.N1D/P1D 76.17,53.24 76.64,53.24 76.77,53.1 76.77,52.31 75.44,50.97 v75.44,50.8 | v69.09,46.33 65.89,46.33 65.58,46.02 65.28,46.02 v65.28,46.33
  Bottom 0.152: v75.44,50.8 74.17,52.07 70.36,52.07 69.09,50.8 v69.09,46.33 | v65.28,46.33 63.71,44.75 51,44.75 50.04,45.72 50.04,54.86 47.99,54.86 47.94,54.81 47.06,54.81 45.99,55.88 MTR_2.MTR+
RPWM_A  (via drill 0.35)
  Top 0.152: R20.1 79.62,53.71 v79.25,53.34 | v77.34,59.31 76.33,60.32 TC4427_R.IN_A | v79.25,46.99 76.71,46.99 75.74,46.02 74.45,46.02 74.15,45.72 46.34,45.72 46.18,45.88 43.69,45.88 v43.69,46.18 | v44.52,49.87 51.82,49.87 51.82,50.45 51.91,50.55 51.91,51.05 51.74,51.23 51.74,51.64 53.19,53.09 53.19,64.01 52.32,64.01 52.32,65.2 51.99,65.53 51.99,66.73 51.82,66.9 51.82,67.06 51.66,67.06 51.56,67.16 33.58,67.16 v33.28,67.46 | STM32F401.PB7 26.44,43.2 v25.91,42.67
  Bottom 0.152: v77.34,59.31 77.22,59.18 76.71,56.74 78.59,54.86 78.59,54 v79.25,53.34 v79.25,46.99 | 43.69,46.99 v43.69,46.18 43.69,49.28 44.28,49.87 v44.52,49.87 | v33.28,67.46 33.28,63.5 37.75,59.03 38.86,59.03 39.22,58.67 39.22,58.17 38.1,57.05 v38.1,50.29 33.53,50.29 v25.91,42.67
RPWM_B  (via drill 0.35)
  Top 0.152: v78.49,59.69 78.88,58.79 R21.1 82.16,57.15 v83.06,57.15 | v77.98,62.23 77.34,62.86 TC4427_R.IN_B | v74.17,44.45 48.77,44.45 47.5,43.18 v46.23,43.18 | 29.97,39.62 30.02,39.58 | v38.1,39.06 38.04,39.06 37.52,39.58 30.02,39.58 | 30.02,39.58 29.45,39.58 29.25,39.77 28.51,39.77 v27.33,38.59 | STM32F401.PB6 24.89,43.7 24.4,43.7 | 24.4,43.7 24.38,43.69 | 24.4,43.7 24.4,41.71 v24.61,41.49
  Bottom 0.152: v78.49,59.69 v77.98,62.23 | v83.06,57.15 83.06,49.53 79.85,46.33 77.73,46.33 75.85,45.72 v74.17,44.45 | v46.23,43.18 46.23,38.61 45.56,38.61 42.41,41.75 41.91,41.75 41.56,41.4 41.56,40.9 41.86,40.59 41.86,38.97 40.88,37.99 39.57,37.99 38.86,38.71 38.51,38.71 38.1,39.12 v38.1,39.06 | v24.61,41.49 24.67,41.44 24.58,41.35 24.58,39.37 24.38,39.17 24.38,35.56 24.4,35.54 25.65,35.54 26.11,35.08 26.11,30.48 26.11,28.49 25.81,28.19 25.81,22.1 26.93,20.98 27.43,20.98 27.78,21.34 27.78,38.1 27.39,38.49 27.39,38.65 v27.33,38.59
RX  (via drill 0.35)
  Top 0.152: v7.11,51.31 9.14,51.31 21.49,51.31 24.13,53.95 30.38,53.95 30.99,53.34 30.99,52.25 32.16,51.08 32.16,50.32 STM32F401.PA10 | v20.83,13.31 30.07,13.31 30.48,13.72 35.89,13.72 36.24,13.36 41.4,13.36 41.75,13.72 43.18,13.72 43.18,21.34 v40.13,21.34
  Bottom 0.152: v7.11,51.31 7.11,28.17 9.48,23.09 14.29,18.29 14.73,18.29 17.68,15.34 17.68,13.72 18.19,13.21 20.73,13.21 v20.83,13.31 | COMM1.4 34.42,27.94 35.58,26.77 36.35,26.77 37.24,25.88 37.24,24.23 v40.13,21.34
S$1  (via drill 0.35)
  Top 0.152: v52.58,49.53 45.33,49.53 C10.2 43.18,49.14 v43.18,49.78 | R22.2 v34.04,68.58 C11.2 35.17,69.2 35.56,69.6 37.98,69.6 R8.1 | STM32F401.VSSA 35.28,37.35 v34.78,36.85 | R10.1 36.97,34.29 36.07,34.29 36.07,34.44 v35.08,35.43 | R14.2 25.01,63.5 v34.54,63.5 | R5.1 36.97,15.61 v36.07,16.51 | v34.54,63.5 34.8,63.5 REG_3V3_SPX3940.GND | R7.1 27.93,56.25 27.94,56.26 | R15.2 24.64,29.58 R6.1 24.11,32.12 v25.4,34.94 | C12.2 30.09,31.75 | v23.37,47.77 ULN2003A.GND | C12.2 27.92,33.92 v25.4,34.94 | R13.2 R12.2 R11.2 4.43,37.73 6.34,35.82 17.71,35.82 18.98,34.55 22.79,34.55 22.8,34.54 v23.37,34.54 | STM32F401.PB2 41.53,46.2 v41.56,46.23 | v23.88,52.83 24.01,52.97 C2000.2 27.8,52.97 27.94,52.83 v27.94,53.34 | v27.94,54.86 27.94,56.26 | 27.94,56.26 C3.C 29.9,55.32 REG_3V3_SPX3940.GND2 38.56,55.32 38.61,55.37 v39.62,55.37 | C12.2 30.34,31.5 v30.48,31.5 31.1,31.5 32.57,32.96 | v39.12,62.99 38.61,63.5 v34.54,63.5 | C6.2 25.91,34.43 v25.4,34.94 | v23.37,38.1 26.42,38.1 26.68,38.36 26.68,40.73 27.03,41.08 27.66,41.08 STM32F401.VSS_1 | v38,67.76 v40.64,67.76 | C7.2 32.57,32.96 | 32.57,32.96 32.57,31.44 34.04,29.97 v35.56,29.97
  Bottom 0.152: v52.58,49.53 52.58,56.9 51.82,57.66 | v43.18,49.78 43.18,47.75 43.02,47.6 42.17,47.6 41.81,47.24 41.81,46.74 41.56,46.48 v41.56,46.23 | v34.04,68.58 34.04,64.01 v34.54,63.5 | v34.78,36.85 34.8,36.83 34.8,35.71 v35.08,35.43 34.95,35.56 30.48,35.56 30.48,36.66 31.09,37.27 31.09,37.77 30.73,38.13 30.23,38.13 28.9,36.8 28.9,33.83 30.35,32.38 30.35,31.63 v30.48,31.5 | v36.07,16.51 36.07,18.29 33.53,20.83 COMM1.3 32.36,26.57 32.36,28.42 33.04,29.11 34.01,29.11 35.18,27.94 COMM1.6 35.56,28.45 v35.56,29.97 | v23.88,52.83 23.37,52.33 23.37,50.29 v23.37,47.77 23.39,46.76 23.37,46.74 v23.37,38.1 v23.37,34.54 25.01,34.54 v25.4,34.94 | v27.94,53.34 v27.94,54.86 | v39.62,55.37 39.62,62.99 v39.12,62.99 39.12,64.63 38,65.74 v38,67.76 | v40.64,67.76 40.84,67.56 51.82,67.56 51.82,57.66 | 51.82,57.66 51.05,58.42 MTR_2.ENC_GND
SWCLK  (via drill 0.35)
  Top 0.152: STM32F401.PA14 24.95,48.2 24.89,48.26 24.6,47.97 v24.28,47.97 | v37.59,22.35 36.07,20.83 27.94,20.83 27.43,21.34 27.43,27.43 26.32,28.54 v25.3,28.54
  Bottom 0.152: v24.28,47.97 24.79,47.46 24.79,47.34 25.15,46.99 25.65,46.99 26.01,47.34 26.01,57.77 24.75,59.03 24.25,59.03 23.07,57.85 23.07,48.32 22.76,48.02 22.76,40.9 22.35,40.29 22.39,39.6 22.81,30.99 22.81,30.78 21.24,29.21 21.24,28.7 21.59,28.35 22.09,28.35 22.29,28.54 23.37,28.54 v25.3,28.54 | COMM1.5 36.07,23.88 v37.59,22.35
SWDIO  (via drill 0.35)
  Top 0.152: STM32F401.PA13 30.78,51.31 30.52,51.31 29.99,51.84 29.46,52.37 v29.46,53.34 | v19.3,19.3 18.29,20.32 15.75,20.32 v15.75,32 | v12.7,34.54 9.65,34.54 9.14,34.54 v9.14,35.05 | v16.76,38.1 v13.95,38.1 | v32,22.86 30.58,21.44 v30.48,21.44 | v26.61,54.86 20.18,54.86 18.56,56.49 11.43,56.49 6.5,51.56 6.5,51.06 6.86,50.7 9.24,50.7 v9.65,50.29
  Bottom 0.152: v19.3,19.3 27.34,19.3 28.2,18.44 28.7,18.44 29.05,18.8 29.05,20.01 v30.48,21.44 | v15.75,32 15.75,37.08 v16.76,38.1 | v13.95,38.1 13.95,35.8 v12.7,34.54 | v9.14,35.05 9.14,39.63 9.24,39.73 9.24,40.23 9.14,40.33 9.14,46.74 9.65,47.24 v9.65,50.29 | COMM1.1 32,24.38 v32,22.86 | v29.46,53.34 28.55,54.26 28.55,55.11 28.19,55.47 27.69,55.47 27.08,54.86 v26.61,54.86
TX  (via drill 0.35)
  Top 0.152: v17.27,55.88 18.29,55.88 19.3,54.87 19.75,54.87 20.36,54.25 30.99,54.25 32.78,52.46 STM32F401.PA9 | v18.8,28.96 v21.84,28.96 | v30.99,29.97 30.48,29.46 v25.4,29.46
  Bottom 0.152: v21.84,28.96 24.38,28.96 24.89,29.46 v25.4,29.46 | COMM1.2 v30.99,29.97 | v17.27,55.88 17.27,42.3 18.8,40.78 v18.8,28.96
VBAT  (via drill 0.35)
  Top 0.152: TC4427_L.VDD 69.72,33.66 69.09,33.02 v68.42,33.02 67.82,33.02 | v69.09,36.83 72.53,36.83 C4.1 v76.71,38.1 | v72.9,50.8 v66.55,51.31 | TC4427_R.VDD 69.6,61.59 68.96,60.96 v67.06,61.47 66.55,64.01 67.47,64.01 67.57,64.11 68.07,64.11 68.23,63.94 72.97,63.94 C5.1 | v79.25,44.45 78.59,43.79 78.59,42.93 77.57,41.91 v72.9,41.91 | v75.44,44.45 75.03,44.45 74.42,43.84 73.92,43.84 73.61,44.14 50.04,44.14 49.07,43.18 48.11,43.18 v47.5,42.57 | v47.5,36.83 41.52,36.83 R9.2
  Bottom 0.152: v68.42,33.02 68.42,34.9 69.09,35.56 v69.09,36.83 | v76.71,38.1 v72.9,41.91 v72.9,50.8 | v79.25,44.45 78.84,44.45 78.23,45.06 77.73,45.06 77.12,44.45 v75.44,44.45 | v47.5,42.57 47.5,42.52 46.89,41.92 46.89,41.41 47.5,40.81 v47.5,36.83 | v67.06,61.47 66.55,60.96 v66.55,51.31
VOLTMETER  (via drill 0.35)
  Top 0.152: STM32F401.PA2 37.88,38.1 v38.61,38.1 | v38.61,35.56 37.71,36.46 R10.2 | v39.12,30.99 37.71,30.48 R9.1
  Bottom 0.152: v38.61,38.1 v38.61,35.56 38.61,33.88 39.22,33.27 39.22,32.77 39.12,32.67 v39.12,30.99